# EAGLE board D-SP-X1-01-A (EAGLE 9.6.2)

Size 100 x 80 mm. Coordinates in mm from the lower left corner, seen from the top.
Outline: 0,0 100,0 100,80 0,80 0,0
Copper layers (1*16): Top 0.035mm / dielectric 1.5mm / Bottom 0.035mm
Design rules "default": minimum track width 6mil, minimum drill 0.35mm, track to track 6mil, track to pad 6mil, pad to pad 6mil, via to via 6mil, smd to smd 6mil, copper to edge 40mil, drill to drill 6mil, minimum pad ring 10mil, minimum via ring 8mil, stop-mask expansion 4mil, vias tented up to drill 0mil, thermal gap 10mil

## Footprints (pad centres in the part's own frame; a part is rotated, then mirrored left to right if it is on the bottom)
MGM210L = smd 1.6 x 1.1: P$1 0.5,9.78; P$2 0.5,8.07; P$3 0.5,6.36; P$4 0.5,4.65; P$5 0.5,2.94; P$6 0.5,1.23 | smd 1.1 x 1.6: P$7 2.23,0.5; P$8 3.94,0.5; P$9 5.65,0.5; P$10 7.36,0.5; P$11 9.07,0.5; P$12 10.78,0.5 | smd 3.3 x 1.3: P$13 14.67,2.25; P$14 14.67,4.15; P$15 14.67,6.05; P$16 14.67,7.96; P$17 14.67,9.85; P$18 14.67,11.75

## Placement (x,y rotation side)
U$1  MGM210L  [MGM210L]  21.59,22.86 0 top

## Library data of the parts
U$1 = mgm210